# EAGLE board flank_detection (EAGLE 7.2.0)
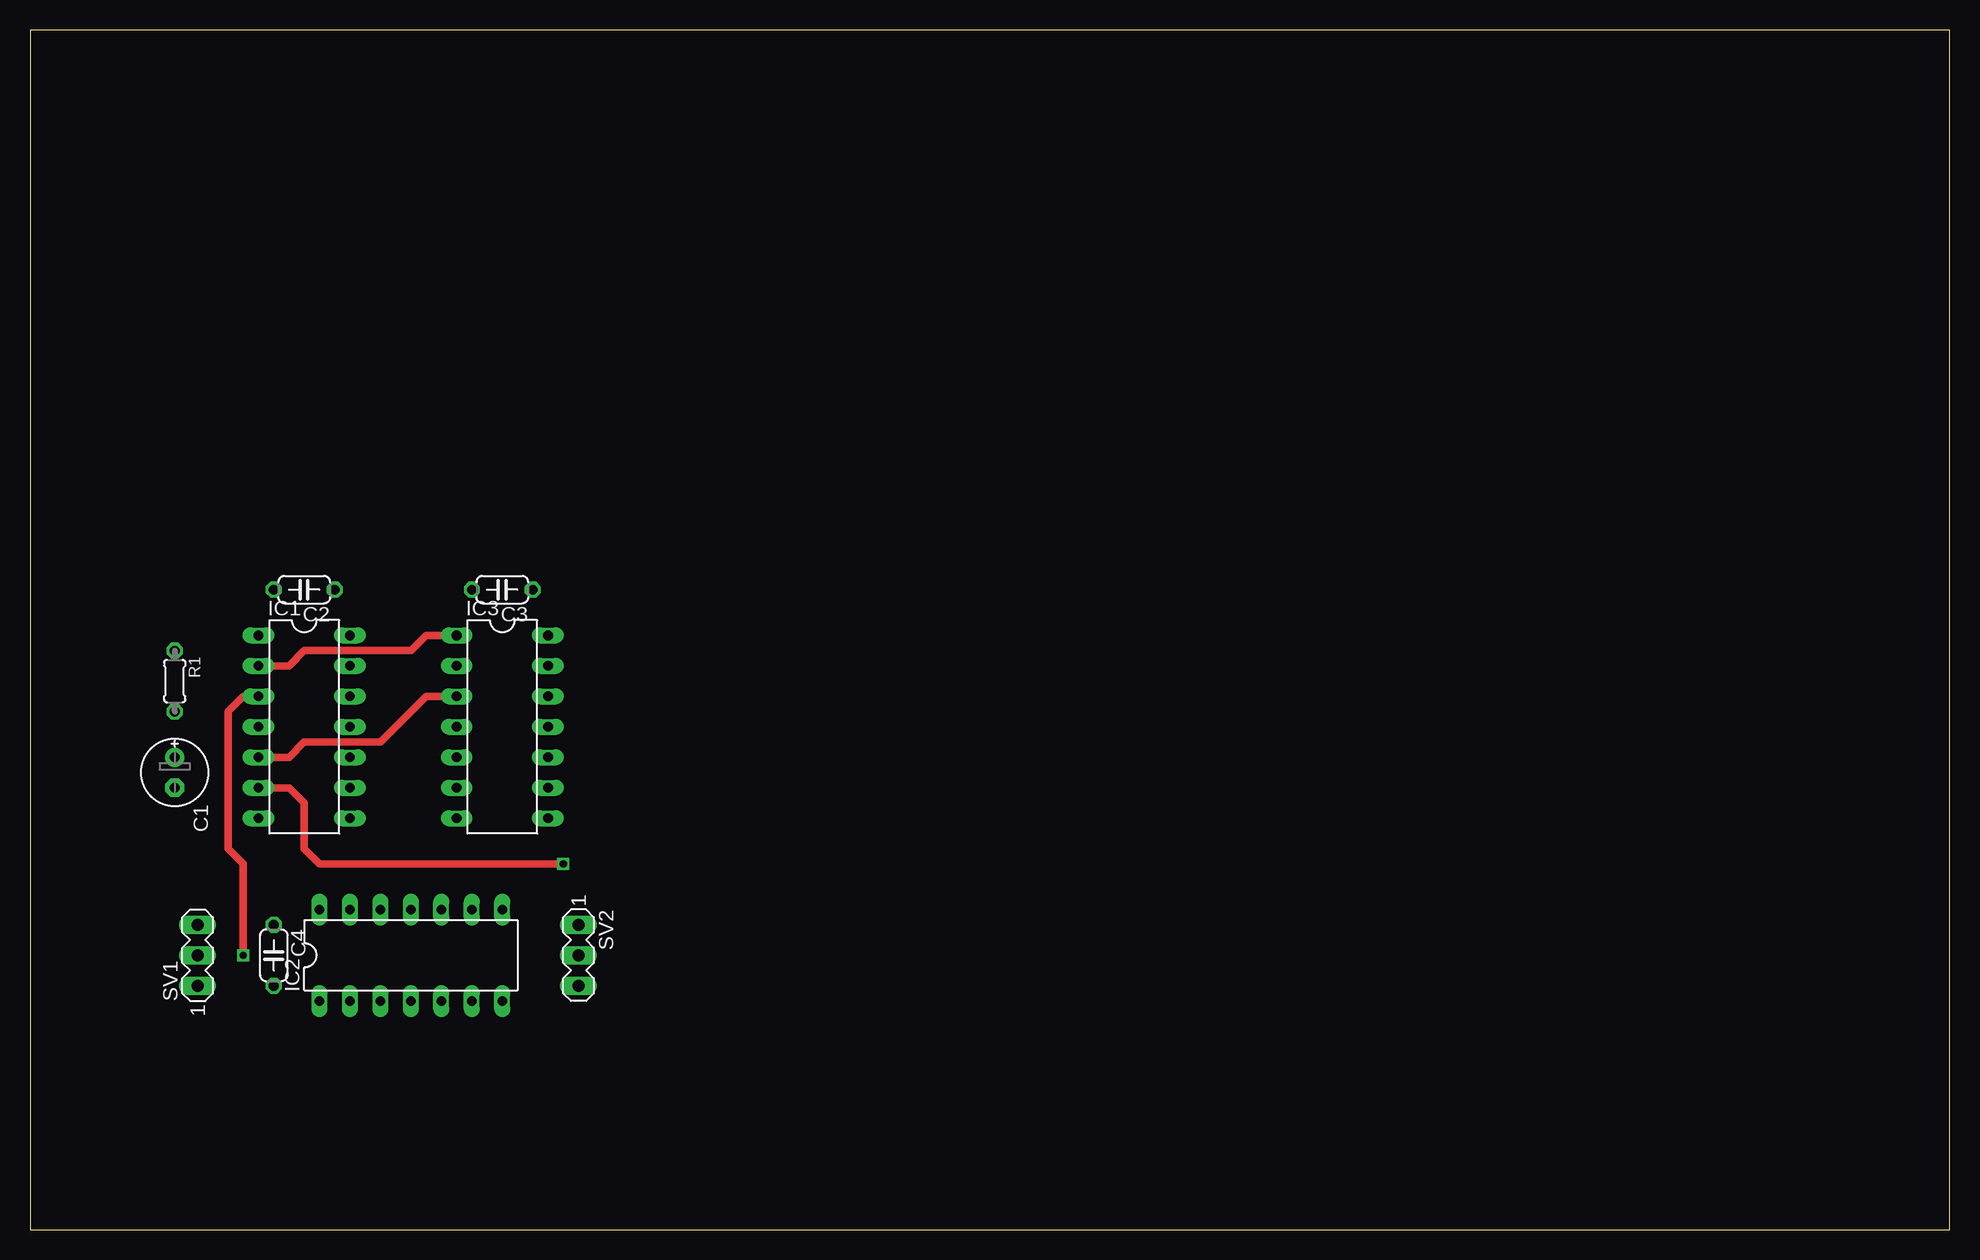
[diagram p0: board, top side]
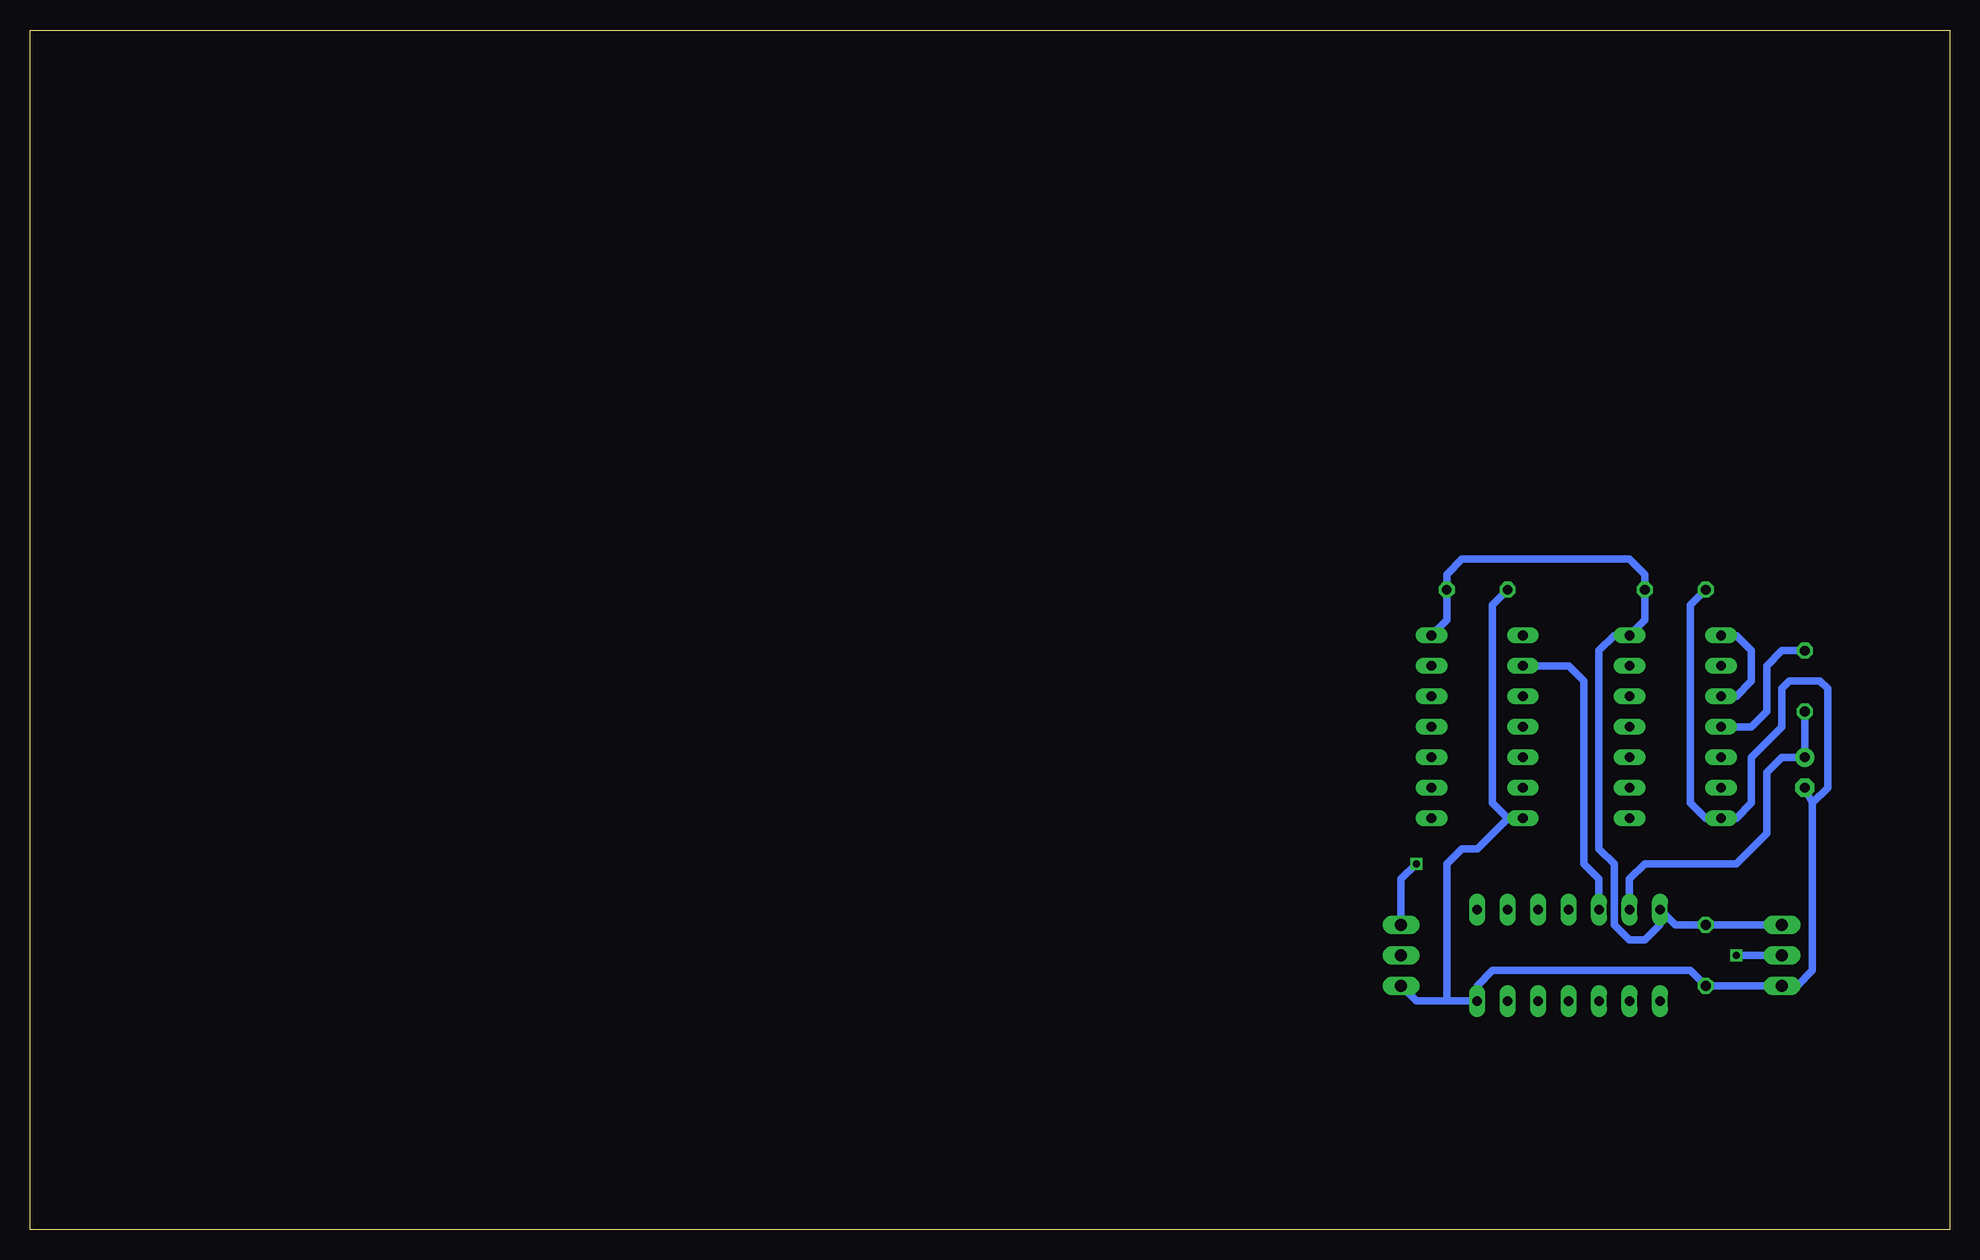
[diagram p1: board, bottom side, seen from below]

Size 160 x 100 mm. Coordinates in mm from the lower left corner, seen from the top.
Outline: 0,0 160,0 160,100 0,100 0,0
Copper layers (1*16): Top 0.035mm / dielectric 1.5mm / Bottom 0.035mm
Design rules "default": minimum track width 10mil, minimum drill 24mil, track to track 8mil, track to pad 8mil, pad to pad 8mil, via to via 8mil, smd to smd 8mil, copper to edge 40mil, drill to drill 8mil, minimum pad ring 10mil, minimum via ring 8mil, stop-mask expansion 4mil, vias tented up to drill 0mil, thermal gap 10mil

## Footprints (pad centres in the part's own frame; a part is rotated, then mirrored left to right if it is on the bottom)
E2,5-6E = drill 0.813 pad 1.575: + -1.27,0 | drill 0.813 pad 1.575 octagon: - 1.27,0
C050-024X044 = drill 0.813 octagon: 1 -2.54,0; 2 2.54,0
DIL14 = drill 0.813 long: 1 -7.62,-3.81; 2 -5.08,-3.81; 3 -2.54,-3.81; 4 0,-3.81; 5 2.54,-3.81; 6 5.08,-3.81; 7 7.62,-3.81; 8 7.62,3.81; 9 5.08,3.81; 10 2.54,3.81; 11 0,3.81; 12 -2.54,3.81; 13 -5.08,3.81; 14 -7.62,3.81
0204/5 = drill 0.813 octagon: 1 -2.54,0; 2 2.54,0
MA03-1 = drill 1.016 long: 1 -2.54,0; 2 0,0; 3 2.54,0

## Placement (x,y rotation side)
C1  2µ2  [E2,5-6E]  12.06,38.1 270 top
C2  100n  [C050-024X044]  22.86,53.34 180 top
C3  100n  [C050-024X044]  39.37,53.34 180 top
C4  100n  [C050-024X044]  20.32,22.86 270 top
IC1  74AC04N  [DIL14]  22.86,41.91 270 top
IC2  74AC14N  [DIL14]  31.75,22.86 0 top
IC3  74AC86N  [DIL14]  39.37,41.91 270 top
R1  270R  [0204/5]  12.06,45.72 270 top
SV1  [MA03-1]  13.97,22.86 90 top
SV2  [MA03-1]  45.72,22.86 270 top

## Library data of the parts
C1-C4 R1 = resistor
IC1-IC3 = 74xx-eu
SV1 SV2 = con-lstb; OC_FARNELL: unknown; OC_NEWARK: unknown

## Nets
GND: C1.- C2.2 C3.2 C4.2 IC1.7 IC2.7 IC3.7 SV1.1 SV2.3
N$1: IC1.1 IC1.3 SV1.2
N$2: IC1.4 R1.1
N$3: C1.+ IC2.13 R1.2
N$4: IC1.2 IC3.1
N$5: IC2.12 IC3.2
N$6: IC1.5 IC3.3
N$7: IC1.6 SV2.1
VCC: C2.1 C3.1 C4.1 IC1.14 IC2.14 IC3.14 SV1.3

## Tracks (layer width: path | path; a pad name or v marks a point on that pad's centre or on a via)
GND
  Bottom 0.61: 41.91,19.05 IC2.7 39.37,20.32 38.1,21.59 21.59,21.59 C4.2 SV1.1 12.7,20.32 11.43,21.59 11.43,35.56 | 41.91,19.05 44.45,19.05 SV2.3 | C3.2 38.1,52.07 38.1,35.56 36.83,34.29 | 36.83,34.29 IC3.7 | C2.2 21.59,52.07 21.59,35.56 20.32,34.29 IC1.7 17.78,34.29 16.51,35.56 16.51,39.37 13.97,41.91 13.97,45.09 13.34,45.72 10.79,45.72 10.16,45.09 10.16,36.83 11.43,35.56 | C1.- 11.43,35.56 | 36.83,34.29 39.37,31.75 40.64,31.75 41.91,30.48 41.91,19.05
N$1  (via drill 0.6)
  Top 0.61: v17.78,22.86 17.78,30.48 16.51,31.75 16.51,43.18 17.78,44.45 IC1.3
  Bottom 0.61: IC1.1 17.78,49.53 16.51,48.26 16.51,45.72 17.78,44.45 IC1.3 | SV1.2 v17.78,22.86
N$2
  Bottom 0.61: IC1.4 16.51,41.91 15.24,43.18 15.24,46.99 13.97,48.26 R1.1
N$3
  Bottom 0.61: R1.2 C1.+ 13.97,39.37 15.24,38.1 15.24,33.02 17.78,30.48 25.4,30.48 26.67,29.21 IC2.13
N$4
  Top 0.61: IC1.2 21.59,46.99 22.86,48.26 31.75,48.26 33.02,49.53 IC3.1
N$5
  Bottom 0.61: IC2.12 29.21,29.21 30.48,30.48 30.48,45.72 31.75,46.99 IC3.2
N$6
  Top 0.61: IC1.5 21.59,39.37 22.86,40.64 29.21,40.64 33.02,44.45 IC3.3
N$7  (via drill 0.6)
  Top 0.61: v44.45,30.48 24.13,30.48 22.86,31.75 22.86,35.56 21.59,36.83 IC1.6
  Bottom 0.61: SV2.1 45.72,29.21 v44.45,30.48
VCC
  Bottom 0.61: SV1.3 C4.1 22.86,25.4 IC2.14 24.13,25.4 25.4,24.13 26.67,24.13 27.94,25.4 27.94,30.48 29.21,31.75 29.21,48.26 27.94,49.53 IC1.14 25.4,50.8 C2.1 25.4,54.61 26.67,55.88 40.64,55.88 41.91,54.61 C3.1 41.91,50.8 IC3.14